# Altium PCB PCB1.PcbDoc
Units mm, origin at the board's own origin, x right, y up, seen from the top; angles counter-clockwise.
Board outline 152.4 x 101.6 mm, 2 copper layers (Top Layer, Bottom Layer); 73 components, 49 nets, 271 pads, 36 vias.
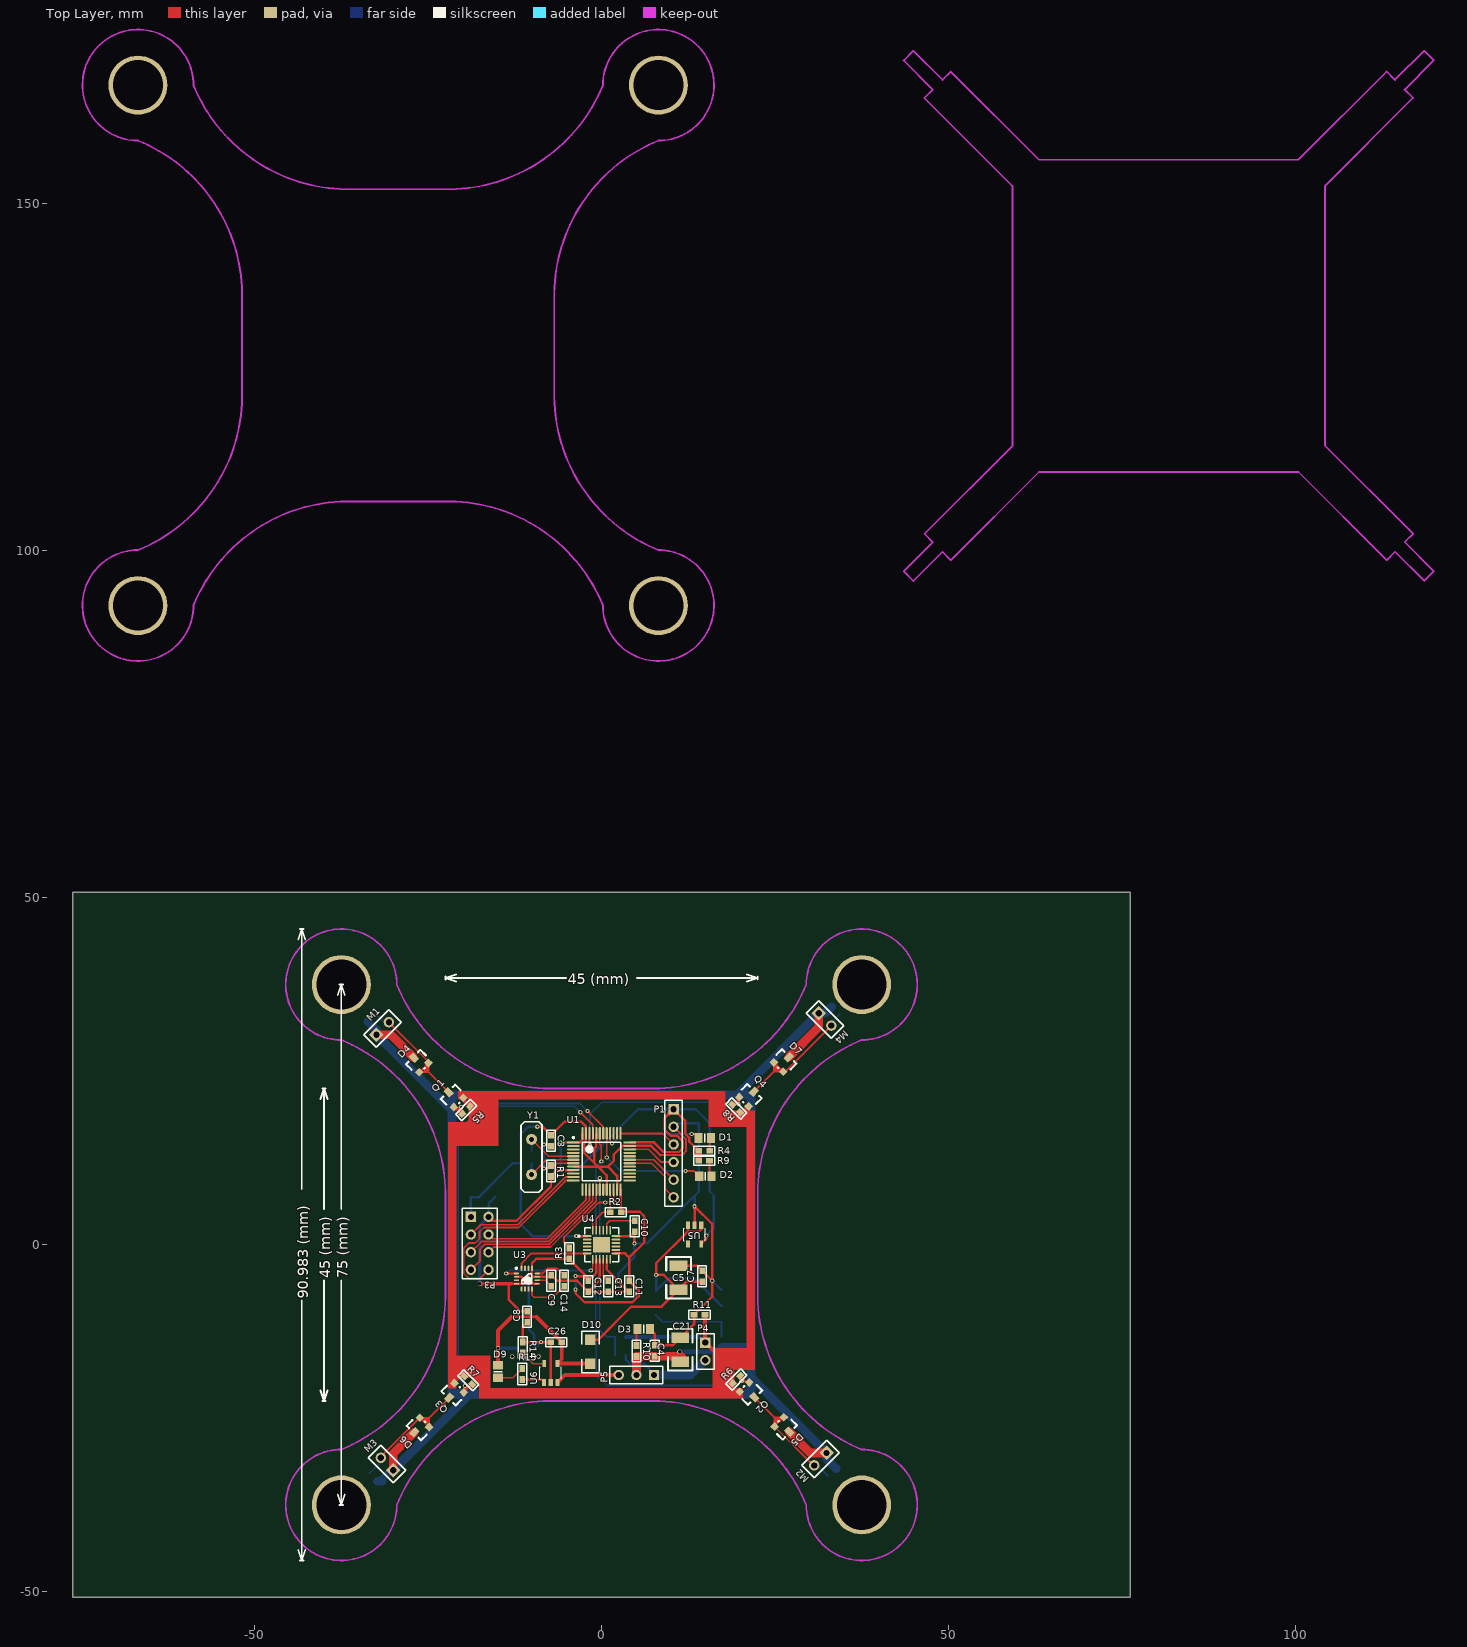
[diagram p0: Top Layer view]
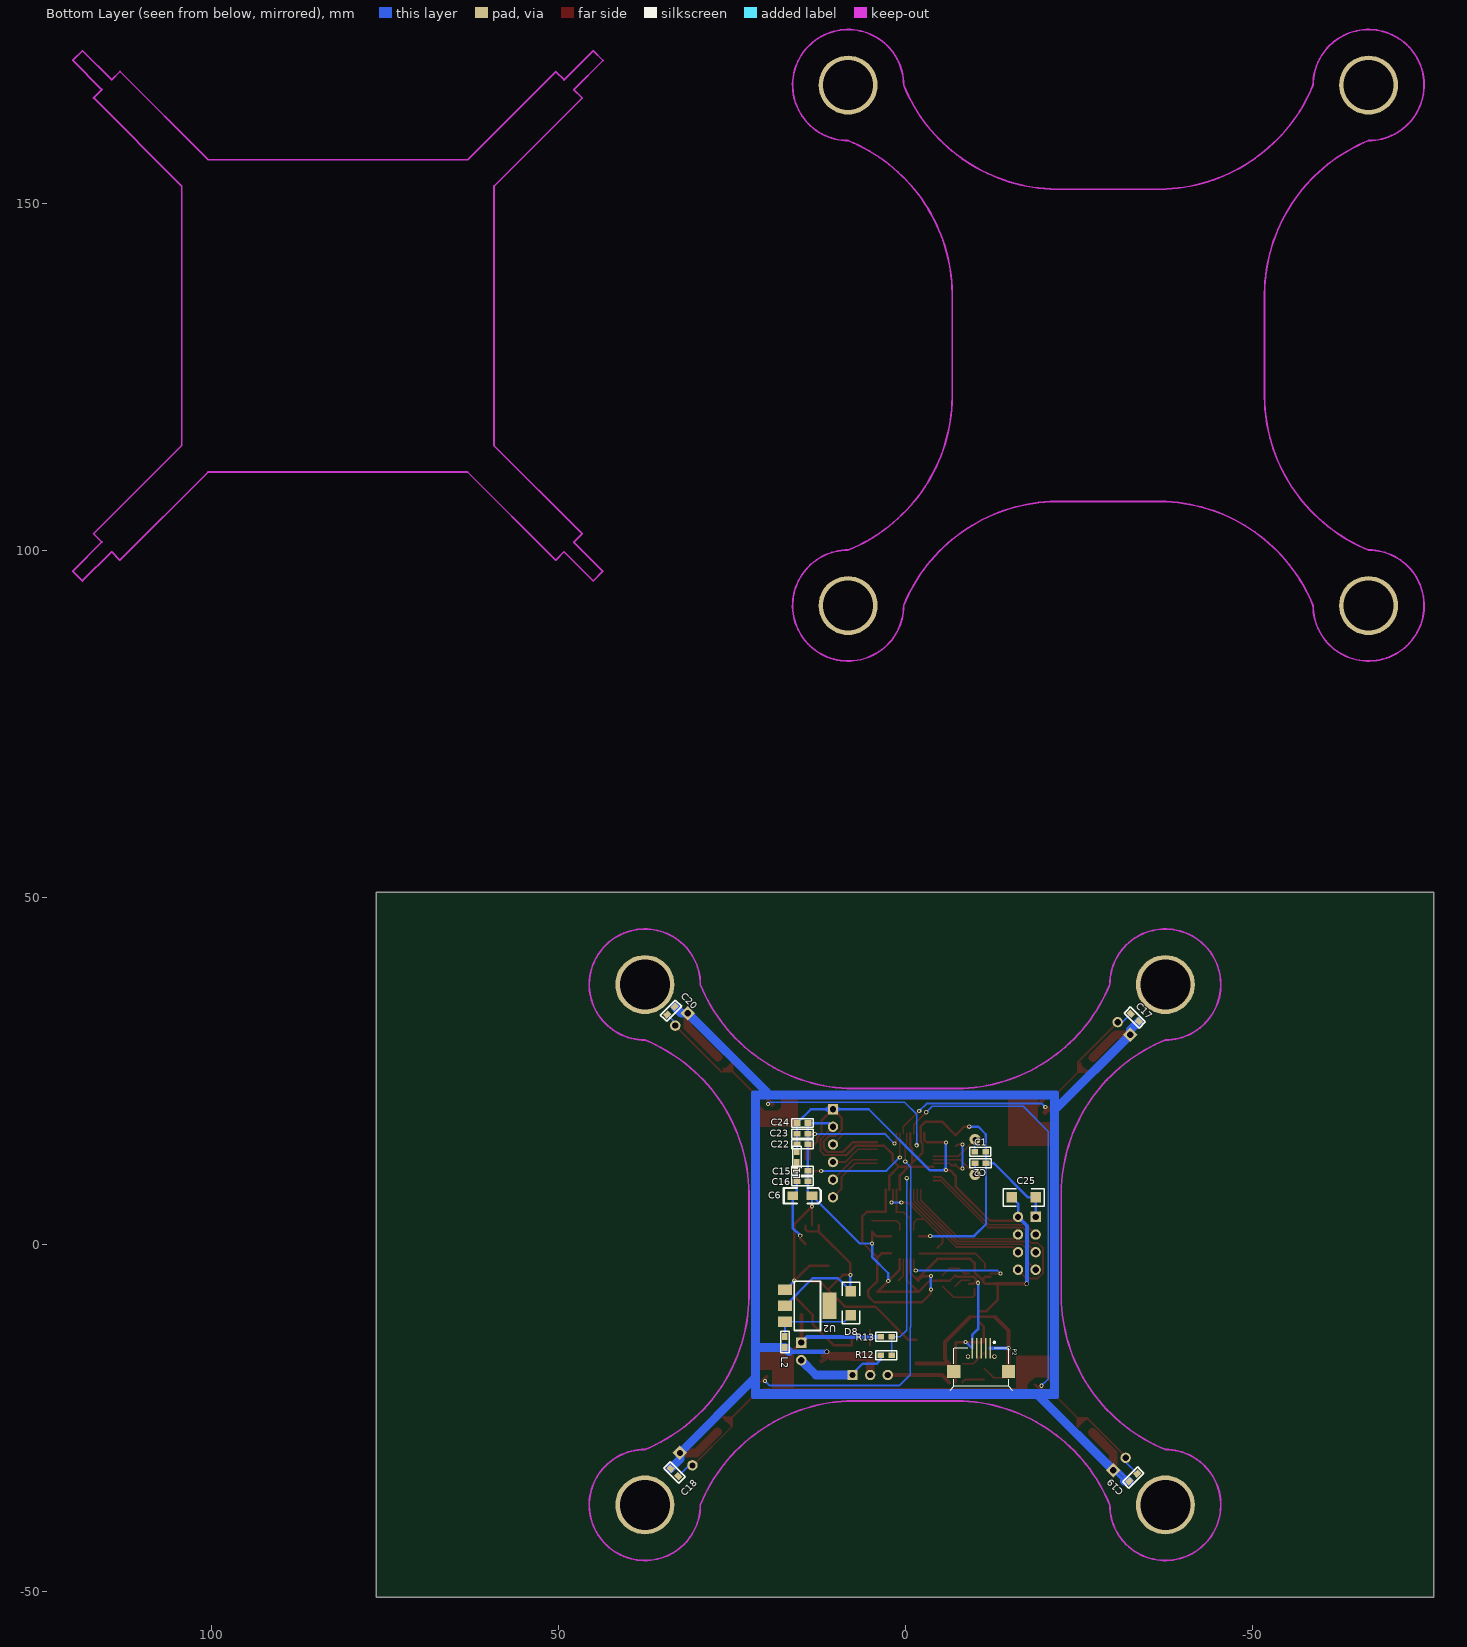
[diagram p1: Bottom Layer view, seen from below]
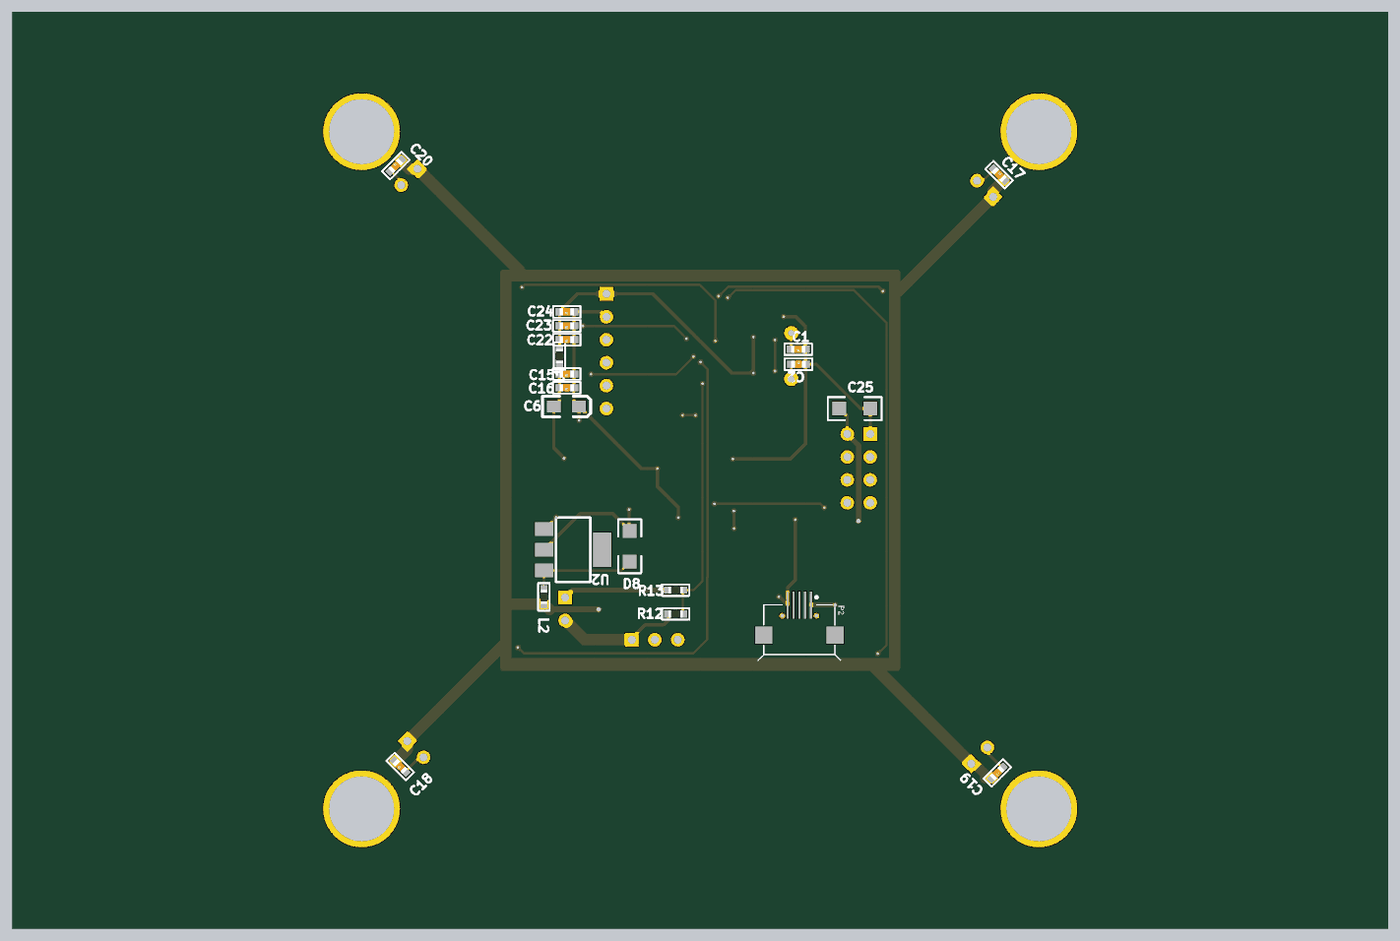
[diagram p2: 3D render of the assembled board from below, using the file's embedded part models]

## Layer stack, top to bottom
Top Solder: solder mask 0.0102, Solder Resist, Dk 3.5
Top Layer: signal copper 0.0356
Dielectric 1: dielectric 0.32, FR-4, Dk 4.8
Bottom Layer: signal copper 0.0356
Bottom Solder: solder mask 0.0102, Solder Resist, Dk 3.5

## Board outline
-76.2,-50.8 76.2,-50.8 76.2,50.8 -76.2,50.8

## Design rules (kind name [scope] priority, off if disabled: settings)
Clearance [All] p1: gap=0.139
PolygonConnect [All] p1: connectstyle=Relief reliefconductorwidth=0.254 reliefentries=4 polygonreliefangle="90 Angle" airgapwidth=0.254
RoutingVias [All] p1: holewidth=0.711 width=1.27 viastyle="Through Hole" minholewidth=0.711 minwidth=1.27 maxholewidth=0.711 maxwidth=1.27
SolderMaskExpansion [All] p1: expansion=0.102
Width Width_BGND [InNet('BGND')] p1: maxlimit=0.854 minlimit=0.254 preferedwidth=0.354
Width Width_GND [InNet('GND')] p2: maxlimit=0.554 minlimit=0.254 preferedwidth=0.354
Width Width_3V3 [InNet('VCC')] p3: maxlimit=1.27 minlimit=0.254 preferedwidth=0.508
Width Width_BAT [InNet('VCC_BAT')] p4: maxlimit=2.032 minlimit=0.254 preferedwidth=1.016
Width Width_3.7 [InNet('VCC_3.7VOUT')] p5: maxlimit=2.032 minlimit=0.254 preferedwidth=1.016
Width Width_1 [All] p6: maxlimit=0.554 minlimit=0.254 preferedwidth=0.254
29 further rules are at their usual default settings.

## Components (designator, comment, footprint, x,y, rotation, side; value= is the part's Value field where it differs from the comment)
C1 "Cap Semi" 0603-N-CAP -12.395,12.751 r0 bottom
C2 "Cap Semi" 0603-N-CAP -9.322,12.395 r180 bottom
C3 "Cap Semi" 0603-N-CAP -6.629,16.535 r270 top
C4 "Cap" 0603-N-CAP 8.331,-13.741 r270 top
C5 "Cap Pol3" 1210 11.1,-6.477 r90 top
C6 "Cap Pol3" 3216 16.205,7.061 r180 bottom
C7 "Cap" 0603-N-CAP 15.138,-2.972 r270 top
C8 "Cap Semi" 0603-N-CAP -11.379,-11.938 r90 top
C9 "Cap Semi" 0603-N-CAP -6.579,-3.632 r270 top
C10 "Cap Semi" 0603-N-CAP 5.436,4.216 r270 top
C11 "Cap Semi" 0603-N-CAP 3.327,-7.544 r90 top
C12 "Cap Semi" 0603-N-CAP -1.27,-4.445 r270 top
C13 "Cap Semi" 0603-N-CAP 0.33,-7.544 r90 top
C14 "Cap Semi" 0603-N-CAP -4.75,-3.632 r270 top
C15 "Cap" 0603-N-CAP 13.233,10.008 r0 bottom
C16 "Cap" 0603-N-CAP 13.233,8.484 r0 bottom
C17 "Cap" 0603-N-CAP -32.461,34.29 r225 bottom
C18 "Cap" 0603-N-CAP 32.588,-34.366 r45 bottom
C19 "Cap" 0603-N-CAP -34.442,-32.893 r315 bottom
C20 "Cap" 0603-N-CAP 35.281,33.096 r135 bottom
C21 "Cap Pol3" 1210 11.354,-16.84 r90 top
C22 "Cap" 0603-N-CAP 13.232,13.818 r0 bottom
C23 "Cap" 0603-N-CAP 13.233,15.342 r0 bottom
C24 "Cap" 0603-N-CAP 13.232,16.891 r0 bottom
C25 "Cap Semi" 1206 -18.821,6.833 r0 bottom
C26 "Cap" 0603-N-CAP -8.077,-13.386 r0 top
D1 "LED2" 6-0805_N 14.884,15.392 r180 top
D2 "LED2" 6-0805_N 14.961,9.881 r180 top
D3 "LED2" 6-0805_N 6.096,-12.141 r0 top
D4 "BAT54C" SOT-23 -27,27 r45 top
D5 "BAT54C" SOT-23 27,-27 r225 top
D6 "BAT54C" SOT-23 -27,-27 r135 top
D7 "BAT54C" SOT-23 27,27 r315 top
D8 "1N5819" 1206 7.798,-10.135 r90 bottom
D9 "LED2" 6-0805_N -14.923,-18.272 r270 top
D10 "1N5819" 1206 -1.6,-17.145 r90 top
L1 "Inductor" 0603-N-res 16.231,11.1 r90 bottom
L2 "Inductor" 0603-N-res 17.958,-15.57 r90 bottom
M1 "MOTO" HDR1X2 -32.436,30.277 r45 top
M2 "MOTO" HDR1X2 32.436,-29.997 r225 top
M3 "MOTO" HDR1X2 -30,-32.5 r135 top
M4 "MOTO" HDR1X2 31.318,33.376 r315 top
P1 "Pointer" HDR1X6 10.389,19.533 r270 top
P2 "USB" "Micro Usb" -10.973,-20.422 r270 bottom
P3 "NRF24L01" "head 4X2" -16.281,4.013 r270 top
P4 "BATTERY" HDR1X2 14.961,-14.097 r270 top
P5 "Switch" HDR1X3 7.569,-18.771 r180 top
Q1 "SI2302" SOT-23 -22,22 r45 top
Q2 "SI2302" SOT-23 22,-22 r225 top
Q3 "SI2302" SOT-23 -22,-22 r135 top
Q4 "SI2302" SOT-23 22,22 r315 top
R1 "Res2" 0603-N-res -6.629,12.167 r270 top
R2 "Res2" 0603-N-res 0.483,5.334 r0 top
R3 "Res2" 0603-N-res -4.013,0.305 r270 top
R4 "Res2" 0603-N-res 16.358,12.903 r180 top
R5 "Res2" 0603-N-res -17.958,20.041 r225 top
R6 "Res2" 0603-N-res 17.882,-20.066 r45 top
R7 "Res2" 0603-N-res -19.837,-17.983 r315 top
R8 "Res2" 0603-N-res 20.041,18.085 r135 top
R9 "Res2" 0603-N-res 16.332,11.455 r180 top
R10 "Res2" 0603-N-res 5.69,-13.767 r270 top
R11 "Res1" 0603-N-res 15.672,-10.744 r180 top
R12 "Res2" 0603-N-res 1.168,-16.561 r0 bottom
R13 "Res2" 0603-N-res 4.267,-12.624 r180 bottom
R14 "Res2" 0603-N-res -12.014,-16.358 r90 top
R15 "Res2" 0603-N-res -12.065,-20.168 r90 top
U1 "STM32F103C8T6" LQFP48_N 0,12 r0 top
U2 "BL8530-501SM" SOT223 17.297,-6.502 r270 bottom
U3 "HMC5883" HMC5883L -10.77,-5.258 r0 top
U4 "MPU6050" "MPU 6050" 0,0 r0 top
U5 "MIC5205" MIC5205 14.986,3.302 r270 top
U6 "LTC4054" MIC5205 -8.89,-20.345 r90 top
Y1 "8MHZ" XTAL1 -10.084,10.109 r90 top

## Footprints (in the part's own frame and the unit in brackets; to place one, negate y for a bottom-side part, rotate by r counter-clockwise, add the part's x,y. Pads: shape width x height; smd on the part's side, far side on the other; paste and mask are expansions set on the pad)
6-0805_N [mm] "Chip Resistor, Body 2.0x1.2mm, IPC Medium Density"
  rect 1.2x1.4 smd: 1(-0.9,0) 2(0.9,0)
  silkscreen extent 0,-0.6 0,0.6, body extent -1.07,-0.7 1.07,0.7, height 0.7
0603-N-CAP [mm]
  rect 0.965x0.8 smd: 1(0.76,-0.65) 2(2.34,-0.65)
  silkscreen extent 0.03,-1.28 3.07,-0.01, body extent 0.75,-1.05 2.35,-0.25, height 0.3
0603-N-res [mm]
  rect 0.965x0.8 smd: 1(0.76,-0.65) 2(2.34,-0.65)
  silkscreen extent 0.03,-1.28 3.07,-0.01, body extent 0.75,-1.05 2.35,-0.25, height 0.4
1206 [mil]
  rect 60x60 smd: 1(0,0) 2(135,0)
  silkscreen extent -50,-50 185,50
1210 [mil]
  rect 60x100 smd: 1(0,0) 2(135,0)
  silkscreen extent -50,-70 185,70
3216 [mil]
  rect 60x50 smd: 1(0,0) 2(110,0)
  silkscreen extent -50,-45 160,45
HDR1X2 [mm] "Connector; Header; 2 Position"
  rect 1.5x1.5 hole 0.9: 1(0,0)
  round 1.5 hole 0.9: 2(2.54,0)
  silkscreen extent -1.27,-1.27 3.81,1.27
HDR1X3 [mm] "Connector; Header; 3 Position"
  rect 1.5x1.5 hole 0.9: 1(0,0)
  round 1.5 hole 0.9: 2(2.54,0) 3(5.08,0)
  silkscreen extent -1.27,-1.27 6.35,1.27
HDR1X6 [mm] "Connector; Header; 6 Position"
  rect 1.5x1.5 hole 0.9: 1(0,0)
  round 1.5 hole 0.9: 2(2.54,0) 3(5.08,0) 4(7.62,0) 5(10.16,0) 6(12.7,0)
  silkscreen extent -1.27,-1.27 13.97,1.27
"head 4X2" [mm]
  rect 1.5x1.5 hole 0.9: 1(0,-2.54)
  round 1.5 hole 0.9: 2(0,0) 3(2.54,-2.54) 4(2.54,0) 5(5.08,-2.54) 6(5.08,0) 7(7.62,-2.54) 8(7.62,0)
  silkscreen extent -1.27,-3.81 8.89,1.27
HMC5883L [mm]
  oval 0.75x0.254 smd: 1(-1.5,1.131) 2(-1.5,0.631) 3(-1.5,0.131) 4(-1.5,-0.369) 9(1.5,-0.369) 10(1.5,0.131) 11(1.5,0.631) 12(1.5,1.131)
  oval 0.254x0.75 smd: 5(-0.75,-1.119) 6(-0.25,-1.119) 7(0.25,-1.119) 8(0.75,-1.119) 13(0.75,1.881) 14(0.25,1.881) 15(-0.25,1.881) 16(-0.75,1.881)
  silkscreen extent -1.62,-0.34 0.73,2.01, body extent -1.5,-1.12 1.5,1.88, height 0.9
LQFP48_N [mm] "Thin QFP, 48-Leads, Body 7x7mm, Pitch 0.5mm, IPC Medium Density"
  oval 1.8x0.3 smd: 1(-4.05,2.75) 2(-4.05,2.25) 3(-4.05,1.75) 4(-4.05,1.25) 5(-4.05,0.75) 6(-4.05,0.25) 7(-4.05,-0.25) 8(-4.05,-0.75) 9(-4.05,-1.25) 10(-4.05,-1.75) 11(-4.05,-2.25) 12(-4.05,-2.75) 25(4.05,-2.75) 26(4.05,-2.25) 27(4.05,-1.75) 28(4.05,-1.25) 29(4.05,-0.75) 30(4.05,-0.25) 31(4.05,0.25) 32(4.05,0.75) 33(4.05,1.25) 34(4.05,1.75) 35(4.05,2.25) 36(4.05,2.75)
  oval 0.3x1.8 smd: 13(-2.75,-4.05) 14(-2.25,-4.05) 15(-1.75,-4.05) 16(-1.25,-4.05) 17(-0.75,-4.05) 18(-0.25,-4.05) 19(0.25,-4.05) 20(0.75,-4.05) 21(1.25,-4.05) 22(1.75,-4.05) 23(2.25,-4.05) 24(2.75,-4.05) 37(2.75,4.05) 38(2.25,4.05) 39(1.75,4.05) 40(1.25,4.05) 41(0.75,4.05) 42(0.25,4.05) 43(-0.25,4.05) 44(-0.75,4.05) 45(-1.25,4.05) 46(-1.75,4.05) 47(-2.25,4.05) 48(-2.75,4.05)
  silkscreen extent -4.17,-2.75 2.75,3.57, body extent -3.5,-3.5 3.5,3.5, height 1.6
MIC5205 [mm]
  rect 1.05x0.6 smd: 1(0.51,-0.625) 2(0.51,-1.575) 3(0.51,-2.525)
  rect 1x0.55 smd: 4(3.21,-2.525) 5(3.21,-0.625)
  silkscreen extent 0.93,-3.11 2.73,-0.01, body extent 0.51,-3.04 3.31,-0.14, height 1.09
"Micro Usb" [mm]
  rect 3x0.25 smd: 1(-5.508,1.3) 2(-5.508,0.65) 3(-5.508,0) 4(-5.508,-0.65) 5(-5.508,-1.3)
  round 0.635 hole 0.457 unplated: MH1(-4.3,1.9) MH2(-4.3,-1.9)
  rect 1.9x1.9 smd: ""(-2.15,-3.95) ""(-2.15,3.95)
  silkscreen extent -6.47,-4.57 0.63,4.57
"MPU 6050" [mm]
  oval 1.25x0.25 smd: 1(-2.075,1.25) 2(-2.075,0.75) 3(-2.075,0.25) 4(-2.075,-0.25) 5(-2.075,-0.75) 6(-2.075,-1.25) 13(2.075,-1.25) 14(2.075,-0.75) 15(2.075,-0.25) 16(2.075,0.25) 17(2.075,0.75) 18(2.075,1.25)
  oval 0.25x1.25 smd: 7(-1.25,-2.075) 8(-0.75,-2.075) 9(-0.25,-2.075) 10(0.25,-2.075) 11(0.75,-2.075) 12(1.25,-2.075) 19(1.25,2.075) 20(0.75,2.075) 21(0.25,2.075) 22(-0.25,2.075) 23(-0.75,2.075) 24(-1.25,2.075)
  rect 2.5x2.3 smd: 25(0,0)
  silkscreen extent -3.37,-2.45 2.45,2.45, body extent -2.41,-2.41 2.41,2.41, height 0.9
SOT223 [mil]
  rect 59x79 smd: 1(0,0) 2(90.55,0) 3(181.1,0)
  rect 150x79 smd: 4(89.88,253.54)
  silkscreen extent -49,52 231,202
SOT-23 [mil]
  rect 36x36 smd: 1(-40,-80) 2(35,-80)
  rect 36x50 smd: 3(-2,0)
  silkscreen extent -60,-85 55,5
XTAL1 [mil]
  round 62 hole 28: 1(0,0) 2(200,0)
  silkscreen extent -100,-60 300,60

## Part data
C1 C2 C3 C8 C9 C10 C11 C12 C13 C14 C25: "Capacitor (Semiconductor SIM Model)"
C4 C7 C15 C16 C17 C18 C19 C20 C22 C23 C24 C26: "Capacitor"
C5 C6 C21: "Polarized Capacitor (Surface Mount)"
D1 D2 D3 D9: "Typical RED, GREEN, YELLOW, AMBER GaAs LED"
D8 D10: library part TUNNEL, "Tunnel FDiode"
P1: library part "Header 6", "Header, 6-Pin"
P2: library part "Header 5", "Header, 5-Pin"
P3: library part "Header 4X2H", "Header, 4-Pin, Dual row, Right Angle"
P4: library part "Header 2", "Header, 2-Pin"
P5: library part "Header 3", "Header, 3-Pin"
Q1 Q2 Q3 Q4: library part MOSFET-N, "N-Channel MOSFET"
R1 R2 R3 R4 R5 R6 R7 R8 R9 R10 R11 R12 R13 R14 R15: "Resistor"
U1: "STM32 ARM-based 32-bit MCU with 64 Kbytes Flash, 48-pin LQFP, Industrial Temperature"
U2: library part ME620633
U5: "5V降压到3.3V"
Y1: library part XTAL, "Crystal Oscillator"

## Free pads (board coordinates)
  round 8.5 hole 7.2: 1(-66.797,167.112) 1(-37.5,37.5) 2(-66.797,92.112) 2(-37.5,-37.5) 3(8.203,92.112) 3(37.5,-37.5) 4(8.203,167.112) 4(37.5,37.5)

## Via types
v1: diameter 0.61, hole 0.305, Top Layer to Bottom Layer, 32 vias
v2: diameter 0.71, hole 0.505, Top Layer to Bottom Layer, 1 vias
v3: diameter 0.61, hole 0.404, Top Layer to Bottom Layer, 1 vias
v4: diameter 0.61, hole 0.505, Top Layer to Bottom Layer, 1 vias
v5: diameter 0.61, hole 0.354, Top Layer to Bottom Layer, 1 vias

## Nets (pads, with @x,y where several pads share a name; then routed paths per layer and width w, separated by ;. In a path a pad name is that pad's centre, name@x,y a point inside that pad or via, vN(x,y) a via of type N, cw(c..) or ccw(c..) an arc to the next point about the centre after c; other vN are vias at no path point)
5V: C5.1 C7.2 D8.2 D10.2 U2.2 U5.1 U5.3 | length 49.6
  Top Layer w0.254: 12.461,1.92 14.087,1.92 ; 14.361,2.194 U5.1
  Top Layer w0.354: D10.2 -0.508,-13.716 4.293,-8.915 8.661,-8.915 C5.1 ; U5.3 12.461,1.92 7.874,-2.667 v1(7.874,-4.343) 8.966,-4.343 C5.1 ; 14.087,1.92 14.361,2.194 ; C7.2 12.265,-5.312 C5.1
  Bottom Layer w0.254: D8.2 D8.2@7.874,-6.629
  Bottom Layer w0.354: v1(7.874,-4.343) 7.874,-6.629 9.703,-4.801 13.296,-4.801 U2.2
AD_IN: R12.1 R13.2 U1.18 | length 28.8
  Top Layer w0.254: U1.18 v1(-0.25,9.597)
  Bottom Layer w0.254: v1(-0.25,9.597) -0.25,-12.298 0.726,-13.274 R13.2 R13.2 R12.1
AUX_CL: U3.1 U4.7 | length 15.6
  Top Layer w0.254: v1(-13.741,-4.14) -12.283,-4.14 U3.1 ; v1(-1.549,-3.708) -1.25,-3.409 U4.7
  Bottom Layer w0.254: v1(-13.741,-4.14) -13.31,-3.708 v1(-1.549,-3.708)
AUX_DA: U3.16 U4.6 | length 10.7
  Top Layer w0.254: U3.16 -11.52,-2.655 -10.115,-1.25 U4.6
BAT_IN: P5.3 U6.3 | length 9.3
  Top Layer w0.554: U6.3 -5.3,-18.771 P5.3
BGND: P4.1 Q1.2 Q2.2 Q3.2 Q4.2 R5.1 R6.1 R7.1 R8.1 R11.1 R13.1 | length 200.6
  Top Layer w0.254: -21.666,-19.456 ccw(c-21.514,-18.034) -20.091,-18.186 ; -21.641,-19.202 ccw(c-21.285,-18.009) -20.091,-18.364 ; Q3.2 -20.237,-18.98 R7.1 R7.1@-19.601,-18.821 ; Q1.2@-19.935,20.943 Q1.2 ; -18.771,-18.694 ccw(c-16.942,-17.882) -16.129,-19.71 ; -18.567,-18.567 ccw(c-16.929,-17.843) -16.205,-19.482 ; -18.034,-18.821 ccw(c-16.497,-18.961) -16.637,-20.498 ; P4.1@14.912,-14.048 P4.1 ; R8.1 R8.1@20.339,19.082
  Top Layer w0.354: -21.285,15.469 -21.285,-17.455 R7.1 ; R7.1@-19.601,-18.821 -18.034,-18.821 -15.646,-21.209 17.658,-21.209 ; -18.288,21.692 15.672,21.692 ; 21.285,-15.367 21.285,17.759
  Top Layer w0.554: -21.285,15.469 -18.364,18.39 -18.364,19.372 R5.1 Q1.2@-19.935,20.943 ; P4.1@14.912,-14.048 R11.1 ; P4.1 18.313,-17.45 18.313,-19.423 R6.1 17.658,-21.209 ; 15.672,21.692 18.282,19.082 R8.1 21.285,17.759 ; 18.377,-18.275 21.285,-15.367 ; R8.1@20.339,19.082 Q4.2
  Bottom Layer w0.554: R13.1 14.137,-13.274 P4.1
CE: P3.3 U1.11 | length 18.2
  Top Layer w0.254: P3.3 -17.399,2.896 -12.087,2.896 -5.233,9.75 U1.11
CHG5V: C26.2 D9.1 D10.1 P2.1 U6.4 | length 27.3
  Top Layer w0.254: D10.1@-1.61,-17.135 D10.1
  Top Layer w0.324: -12.954,-10.389 -9.384,-10.389
  Top Layer w0.554: D9.1 -14.923,-12.357 -12.954,-10.389 ; -9.384,-10.389 C26.2 -5.737,-16.508 U6.4 D10.1@-1.61,-17.135
  Bottom Layer w0.554: v3@-14.923,-14.914 P2.1
  other v3: -14.923,-14.91
CSN: P3.4 U1.14 | length 18.1
  Top Layer w0.254: P3.4 -15.672,0.864 -7.823,0.864 -2.25,6.437 U1.14
GND: C1.1 C2.2 C3.1 C4.1 C5.2 C6.2 C7.1 C8.1 C9.1 C10.2 C11.1 C12.2 C13.1 C15.1 C16.1 C21.2 C22.1 C23.1 C24.1 C25.1 C26.1 D3.2 P1.2 P2.5 P3.1 R11.2 R14.2 U1.8 U1.20 U1.23 U1.35 U1.44 U1.47 U2.1 U3.9 U3.11 U4.1 U4.9 U4.11 U4.18 U5.2 U6.2 | length 218.7
  Top Layer w0.254: C9.1@-7.463,-4.627 C9.1 ; U6.2@-7.335,-19.815 U6.2 ; C10.2@4.75,1.841 C10.2 ; 8.458,12.929 11.608,12.929
  Top Layer w0.284: P1.2 12.167,15.215 12.167,13.487 11.608,12.929
  Top Layer w0.304: -6.439,-5.182 -3.521,-5.182
  Top Layer w0.354: C8.1 -11.364,-11.813 R14.2 v1(-8.712,-14.018) -7.335,-14.018 U6.2@-7.335,-19.815 ; v1(-10.516,-5.486) v1@-10.312,-5.486 ; U3.9 -9.867,-5.627 -10.16,-5.334 -10.16,-4.877 -9.91,-4.627 U3.11 C9.1@-7.463,-4.627 ; v1(-9.246,17.018) -8.522,17.018 C3.1 -5.3,17.755 -2.946,17.755 -2.25,17.058 U1.47 -2.25,14.87 -2.515,14.605 -2.515,13.257 -1.067,11.809 ; C9.1 -6.439,-5.182 ; U1.8 -0.508,11.25 ; v1(-3.627,1.25) U4.1 ; -3.521,-5.182 C12.2@-1.919,-6.784 ; U1.44 -0.75,14.16 -1.067,13.843 -1.067,11.809 ; U4.9 -0.25,-5.115 C12.2@-1.919,-6.784 ; U4.11 0.75,-3.556 C11.1 C13.1 C12.2@-1.919,-6.784 ; U1.20 0.75,9.992 -0.508,11.25 ; U4.18 4.159,1.25 4.75,1.841 v1(4.75,0.178) ; U1.23 2.25,9.917 0.917,11.25 ; D3.2 7.681,-12.826 C4.1 10.264,-14.501 C21.2 13.332,-11.433 R11.2 15.951,-7.475 v1(15.951,-5.195) ; 8.458,12.929 7.137,14.25 U1.35 2.998,14.25 1.755,13.007 1.755,12.088 0.917,11.25 ; C5.2 13.805,-3.048 C7.1 v1(15.951,-5.195) ; U5.2 v1(13.411,5.537) 15.951,2.997 v1(15.951,-5.195) ; -1.067,11.809 -0.508,11.25 ; -0.508,11.25 0.917,11.25
  Bottom Layer w0.254: v1@-8.777,-14.018 v1(-8.712,-14.018) ; C6.2 C6.2@13.993,7.643 ; C22.1 C22.1@13.993,14.466 ; U2.1@17.259,-6.502 U2.1
  Bottom Layer w0.354: P3.1 C25.1 -17.729,6.833 -12.817,11.745 C2.2 ; C1.1@-11.662,13.374 C2.2 ; C1.1 -11.635,15.924 -10.541,17.018 v1(-9.246,17.018) ; v1(-10.516,-5.486) -10.516,-12.167 -9.673,-13.009 P2.5 v1@-8.777,-14.018 ; v1(-3.627,1.25) -9.962,1.25 -11.662,2.95 C2.2 ; v1(2.426,-5.232) 2.426,-4.102 4.75,-1.778 v1(4.75,0.178) 6.528,0.178 C6.2 v1(13.411,5.537) ; P1.2 10.937,17.541 C24.1 C22.1 ; C6.2@13.993,7.643 C16.1 C15.1 C22.1@13.993,14.466 ; v1(15.951,-5.195) U2.1@17.259,-6.502
"IIC2 SCL": R2.1 U1.21 U4.23 | length 7.3
  Top Layer w0.254: U4.23 -0.75,3.771 0.163,4.684 R2.1 1.25,4.691 U1.21
"IIC2 SDA": R3.1 U1.22 U4.24 | length 15.8
  Top Layer w0.254: R3.1 -5.41,0.292 -5.41,1.053 -2.806,3.658 ; U4.24 -1.25,3.18 -1.727,3.658 -2.806,3.658 ; v1(0.533,6.096) -0.368,6.096 -2.806,3.658 ; 1.75,6.327 U1.22
  Bottom Layer w0.254: v1(0.533,6.096) v1(1.956,6.096)
IRQ: P3.8 U1.12 | length 28.5
  Top Layer w0.254: P3.8 -17.551,-4.877 -19.075,-4.877 -19.888,-4.064 -19.888,-0.508 -19.126,0.254 -18.212,0.254 -17.577,0.889 -17.577,1.854 -16.942,2.489 -11.938,2.489 -5.177,9.25 U1.12
"LED GRE": D2.2 U1.41 | length 17.9
  Top Layer w0.254: v1(0.75,12.585) U1.41 ; v1(12.09,10.643) 13.299,10.643 D2.2
  Bottom Layer w0.254: v1(0.75,12.585) 2.692,10.643 v1(12.09,10.643)
"LED RED": D1.2 U1.40 | length 14.9
  Top Layer w0.254: U1.40 1.25,14.854 v1(1.524,14.58) ; v1(13.005,15.977) 13.4,15.977 D1.2
  Bottom Layer w0.254: v1(1.524,14.58) 2.921,15.977 v1(13.005,15.977)
MISO: P3.7 U1.16 | length 24.3
  Top Layer w0.254: P3.7 -17.501,-2.286 -17.501,-0.584 -16.854,0.063 -7.512,0.063 -1.25,6.325 U1.16
MOSI: P3.6 U1.17 | length 20.3
  Top Layer w0.254: P3.6 -15.545,-0.33 -7.35,-0.33 -0.75,6.269 U1.17
MOTOR1: Q1.1 R5.2 U1.42 | length 33.8
  Top Layer w0.254: Q1.1@-21.133,20.015 ccw(c-20.587,20.383) v1(-20.218,19.837) ; v1@-20.345,19.66 cw(c-20.721,20.22) Q1.1 -20.752,19.315 ; v1@-20.066,19.685 ccw(c-19.732,19.447) R5.2@-19.837,19.05 ; v1@-2.184,19.152 cw(c-2.191,18.458) -1.676,18.923 cw(c-1.212,19.438) v1@-1.905,19.431 ; v1(-2.032,19.279) 0.25,16.997 U1.42 ; -20.752,19.315 R5.2@-20.282,18.846 ; -20.752,19.315 -20.741,19.315 v1(-20.218,19.837) ; R5.2@-20.282,18.846 cw(c-19.754,19.309) v1(-20.218,19.837) ; R5.2@-20.282,18.846 R5.2 cw(c-19.649,19.415) v1(-20.218,19.837)
  Bottom Layer w0.254: v1@-20.345,20.015 ccw(c-20.271,20.558) -19.863,20.193 ccw(c-19.568,19.781) v1@-20.066,19.685 ; v1(-20.218,19.837) -19.71,20.345 -3.099,20.345 v1(-2.032,19.279) ; v1@-2.159,19.126 ccw(c-3.864,18.664) -2.388,19.634 ccw(c-1.9,20.119) v1@-1.905,19.431
MOTOR2: Q2.1 R6.2 U1.43 | length 64.2
  Top Layer w0.254: U1.43 -0.25,14.499 -0.025,14.275 v1(-0.025,11.989) ; v1@-0.229,11.989 ccw(c-0.713,12.477) -0.025,12.471 ccw(c0.662,12.477) v1@0.178,11.989 ; R6.2@19.787,-19.075 cw(c19.71,-19.558) v1(20.193,-19.634) cw(c20.171,-21.252) Q2.1@20.97,-19.845 ; R6.2@19.887,-18.871 R6.2 Q2.1@20.97,-19.845 ; v1@20.193,-19.627 20.472,-19.348 ; Q2.1 Q2.1@20.97,-19.845
  Bottom Layer w0.254: v1@-0.178,12.141 cw(c-0.88,12.125) -0.423,11.591 cw(c0.11,11.134) v1@0.127,11.836 ; v1(-0.025,11.989) -0.821,11.193 -0.821,-11.852 -0.762,-11.91 -0.762,-18.72 0.787,-20.269 19.558,-20.269 v1(20.193,-19.634) ; v1@20.041,-19.482 cw(c19.501,-19.556) 19.875,-19.952 cw(c20.248,-20.259) v1@20.345,-19.787
MOTOR3: Q3.1 R7.2 U1.45 | length 68.3
  Top Layer w0.254: Q3.1@-19.888,-20.879 ccw(c-20.053,-20.485) v1(-19.66,-20.32) ; Q3.1@-19.827,-21.282 R7.2 ; Q3.1@-19.812,-21.057 ccw(c-19.977,-20.612) v1@-19.533,-20.447 ; -19.297,-20.683 v1(-19.66,-20.32) ; R7.2@-18.847,-20.168 cw(c-19.329,-19.837) v1(-19.66,-20.32) ; v1@-3.2,18.948 cw(c-3.34,17.886) -2.667,18.72 cw(c-2.288,19.198) v1@-2.896,19.253 ; v1(-3.048,19.101) -1.25,17.303 U1.45
  Bottom Layer w0.254: v1@-19.787,-20.472 ccw(c-21.769,-20.929) -19.964,-19.99 ccw(c-19.225,-18.764) v1@-19.507,-20.168 ; v1(-19.66,-20.32) -20.638,-19.341 -20.638,16.319 -17.005,19.952 -3.9,19.952 v1(-3.048,19.101) ; v1@-3.175,18.948 ccw(c-5.047,18.347) -3.474,19.527 ccw(c-2.866,19.994) v1@-2.896,19.228
MOTOR4: Q4.1 R8.2 U1.46 | length 37.2
  Top Layer w0.254: v1@-1.905,14.275 ccw(c-3.013,14.891) -1.75,14.783 ccw(c-0.171,15.427) v1@-1.473,14.326 ; U1.46 -1.75,14.399 v1(-1.676,14.326) ; R8.2@19.101,19.939 cw(c19.583,19.787) v1(19.736,20.269) ; Q4.1@19.934,20.912 ccw(c20.218,20.472) v1(19.736,20.269) ; 19.355,20.708 ccw(c22.656,16.898) R8.2 cw(c19.326,19.789) v1(19.736,20.269) ; 19.355,20.708 19.845,21.198 ccw(c20.255,20.679) v1(19.736,20.269) ; 19.355,20.708 19.355,20.65 v1(19.736,20.269)
  Bottom Layer w0.254: v1@-1.905,14.326 ccw(c-2.629,14.973) -1.676,14.783 ccw(c-0.984,14.817) v1@-1.473,14.326 ; v1(-1.676,14.326) -1.676,18.796 0.076,20.549 19.456,20.549 ; v1@19.609,20.091 ccw(c19.304,20.244) 19.456,20.549 ; v1(19.736,20.269) 19.456,20.549 ; v1@19.863,20.422 cw(c19.723,20.688) 19.456,20.549
NetC1_2: C1.2 U1.5 Y1.2 | length 8.8
  Top Layer w0.254: Y1.2 -7.645,12.75 U1.5
  Bottom Layer w0.254: Y1.2 -10.055,15.161 C1.2
NetC2_1: C2.1 U1.6 Y1.1 | length 8.6
  Top Layer w0.254: Y1.1 -7.936,12.257 -4.057,12.257 U1.6
  Bottom Layer w0.254: Y1.1 -10.082,10.111 C2.1
NetC3_2: C3.2 R1.1 U1.7 | length 9.1
  Top Layer w0.254: v1(-8.28,10.998) -7.789,10.998 -7.381,11.407 R1.1 -6.754,11.407 -6.411,11.75 U1.7 ; v1(-8.28,14.427) -7.511,14.427 C3.2 ; R1.1@-7.279,11.686 R1.1@-7.254,11.661
  Bottom Layer w0.254: v1(-8.28,10.998) v1(-8.28,14.427)
NetC6_1: C6.1 C15.2 C16.2 L1.1 U5.5 | length 12.8
  Top Layer w0.354: U5.5 15.088,0.819 v5(15.088,1.321)
  Bottom Layer w0.254: C6.1@15.581,7.686 C6.1
  Bottom Layer w0.354: v5(15.088,1.321) 16.205,2.438 C6.1 ; C6.1@15.581,7.686 L1.1
NetC9_2: C9.2 U3.10 | length 2.4
  Top Layer w0.254: U3.10 -8.074,-5.127 C9.2
NetC10_1: C10.1 U4.20 | length 5.2
  Top Layer w0.254: U4.20 0.75,3.011 1.196,3.456 C10.1
NetC13_2: C13.2 U4.10 | length 3.4
  Top Layer w0.254: U4.10 0.25,-4.474 C13.2
NetC14_1: C14.1 U3.12 | length 4.6
  Top Layer w0.254: U3.12 -8.47,-4.127 -7.722,-3.378 -6.414,-3.378 C14.1
NetC14_2: C14.2 U3.8 | length 6.3
  Top Layer w0.254: U3.8 -10.02,-7.252 -9.703,-7.569 -6.997,-7.569 C14.2
NetC17_1: C17.1 D4.1 D4.2 M1.2 Q1.3 | length 24.8
  Top Layer w0.254: M1.2 -24.935,26.368 D4.2 ; D4.1@-26.391,25.07 cw(c-24.719,20.811) -25.044,25.375 ; -25.375,24.845 cw(c-2.281,24.281) D4.2@-25.298,26.238 ; -25.171,24.845 cw(c-21.707,24.93) D4.2 ; -25.044,25.095 ccw(c-25.152,22.445) D4.1 ; Q1.3 -24.917,24.845 ; D4.1 D4.2 ; D4.1 -24.917,24.845 ; D4.2 cw(c-55.874,25.106) -24.917,24.845
  Bottom Layer w0.254: C17.1 -31.319,32.073 M1.2
NetC18_1: C18.1 D5.1 D5.2 M2.2 Q2.3 | length 26.9
  Top Layer w0.254: Q2.3 24.917,-24.845 ; 24.892,-25.095 ccw(c25.4,-24.536) D5.1@25.959,-25.044 ; D5.2@24.917,-25.857 ccw(c23.928,-24.49) 25.578,-24.845 ; 24.917,-25.349 ccw(c25.362,-24.956) 25.756,-25.4 ; D5.2@24.968,-26.158 ccw(c23.311,-25.566) 24.917,-24.845 ; D5.1@26.06,-24.79 cw(c25.461,-24.246) 24.917,-24.845 ; M2.2 30.536,-31.793 D5.2 ; 24.917,-24.845 cw(c24.252,-25.527) D5.2 ; 24.917,-24.845 ccw(c52.348,-25.153) D5.2 ; 24.917,-24.845 D5.1 D5.2
  Bottom Layer w0.254: M2.2 31.09,-31.793 C18.1
NetC19_1: C19.1 D6.1 D6.2 M3.2 Q3.3 | length 25.3
  Top Layer w0.254: M3.2 -31.796,-30.539 D6.2 ccw(c-25.691,-11.956) -24.845,-24.917 ; D6.2 D6.1 -24.845,-24.917 ; D6.2@-26.086,-25.197 cw(c-25.489,-27.487) -24.892,-25.197 ; -25.806,-25.375 cw(c-25.455,-27.307) -24.892,-25.425 ; -25.578,-24.968 ccw(c-24.856,-24.957) D6.1@-24.845,-25.679 ; -25.248,-25.019 ccw(c-24.576,-25.287) -24.845,-25.959 cw(c-24.324,-25.438) -24.845,-24.917 ; Q3.3 -24.845,-24.917
  Bottom Layer w0.254: C19.1 -31.796,-31.321 M3.2
NetC20_1: C20.1 D7.1 D7.2 M4.2 Q4.3 | length 24.2
  Top Layer w0.254: Q4.3 24.845,24.917 ; 24.816,25.578 cw(c29.807,-37.148) 25.502,25.629 ; D7.1@24.816,25.832 ccw(c24.968,26.086) 25.222,25.933 ; 24.841,25.375 ccw(c25.159,43.218) D7.2@26.162,25.4 ; 24.845,25.146 ccw(c25.16,33.568) D7.2@26.137,25.197 ; M4.2 26.469,24.935 D7.2 ; 24.845,24.917 ccw(c25.106,55.874) D7.2 ; 24.845,24.917 D7.1 D7.2
  Bottom Layer w0.254: M4.2 33.114,32.005 C20.1
NetD1_1: D1.1 R4.1 | length 1.9
  Top Layer w0.254: R4.1 15.598,15.206 D1.1
NetD2_1: D2.1 R9.1 | length 2.3
  Top Layer w0.254: R9.1 15.572,10.169 D2.1
NetD3_1: D3.1 R10.1 | length 2.2
  Top Layer w0.254: R10.1 D3.1@5.04,-12.298
NetD8_1: D8.1 L2.2 U2.3 | length 12
  Bottom Layer w0.254: D8.1 8.766,-11.102 U2.3 17.308,-11.113 L2.2
NetD9_2: D9.2 R15.2 | length 4.1
  Top Layer w0.254: D9.2 -12.759,-19.172 R15.2
NetR14_1: R14.1 U6.5 | length 3.7
  Top Layer w0.254: R14.1 -9.826,-17.135 U6.5
NetR15_1: R15.1 U6.1 | length 3.3
  Top Layer w0.254: R15.1 -8.693,-19.408 U6.1
RXD: P1.5 U1.31 | length 7.5
  Top Layer w0.254: U1.31 7.511,12.25 P1.5
SCK: P3.5 U1.15 | length 21.7
  Top Layer w0.254: P3.5 -17.297,0.457 -7.674,0.457 -1.75,6.381 U1.15
SWCLK: P1.3 U1.37 | length 8.3
  Top Layer w0.254: U1.37 8.791,16.05 P1.3
SWDIO: P1.4 U1.34 | length 7.1
  Top Layer w0.254: U1.34 6.773,13.75 8.611,11.913 P1.4
TXD: P1.6 U1.30 | length 9.4
  Top Layer w0.254: U1.30 7.198,11.75 9.144,9.804 9.144,8.077 P1.6
VCC: C8.2 C11.2 C12.1 C22.2 C23.2 C24.2 C25.2 L1.2 P1.1 P3.2 R1.2 R2.2 R3.2 R4.2 R9.2 U1.1 U1.9 U1.24 U1.36 U1.48 U3.2 U3.4 U3.13 U4.8 U4.13 | length 176.3
  Top Layer w0.254: v4@-17.526,-5.842 cw(c-17.094,-6.875) -16.942,-5.766 ; v4@-17.501,-5.41 ccw(c-17.107,-4.737) -16.891,-5.486 ; -2.604,-4.521 C12.1 C12.1@-1.92,-4.778 ; P1.1@9.83,19.558 cw(c4.19,21.539) 9.347,18.517 cw(c10.762,16.386) 10.439,18.923 cw(c10.08,16.136) 11.214,18.707 cw(c13.148,19.711) P1.1@10.973,19.583 ; R4.2@13.691,13.437 ccw(c8.136,10.945) 13.208,14.312 ccw(c31.057,44.489) R4.2@14.072,13.818 ; -6.325,10.75 ccw(c-6.792,12.185) -5.893,10.973 ccw(c-5.27,11.724) -5.334,10.75 ccw(c-5.261,9.671) -5.867,10.566 cw(c24.257,86.245) -6.325,10.75
  Top Layer w0.304: 8.935,13.386 11.201,13.386
  Top Layer w0.354: P3.2 -15.723,3.454 -12.243,3.454 -7.279,8.418 -7.279,9.928 -6.458,10.75 U1.9 ; U3.2 -11.528,-4.627 -11.278,-4.877 -11.278,-5.232 ; C8.2 -11.662,-9.598 -13.386,-7.874 -13.386,-5.969 -13.044,-5.627 U3.4 -11.52,-5.627 -11.278,-5.385 -11.278,-5.232 ; v1(-5.885,14.75) U1.1 -3.132,14.75 -2.75,15.132 U1.48 ; v1(-3.734,-6.452) -3.734,-6.985 -2.438,-8.28 4.445,-8.28 5.334,-7.391 5.334,-6.56 C11.2 3.977,-1.829 ; v1(-3.734,-4.521) -2.604,-4.521 ; C12.1 -0.75,-4.035 U4.8 ; C12.1@-1.92,-4.778 R3.2 -9.401,-2.035 -10.02,-2.654 U3.13 -10.02,-3.974 -11.278,-5.232 ; U4.13 3.398,-1.25 3.977,-1.829 ; U1.24 2.75,4.757 5.505,4.757 6.172,4.089 6.172,0.365 3.977,-1.829 ; U1.36 7.571,14.75 8.935,13.386 ; 11.201,13.386 11.684,13.868 11.684,14.91 10.871,15.723 9.957,15.723 9.119,16.561 9.119,18.263 P1.1 12.04,17.882 12.04,16.002 12.649,15.392 12.649,14.871 13.992,13.528 R9.2
  Top Layer w0.554: v4(-17.514,-5.627) -13.044,-5.627
  Bottom Layer w0.254: -5.885,11.176 ccw(c-5.466,11.181) -5.461,10.762 ; -5.885,11.43 ccw(c-5.2,11.448) -5.182,10.762 ; P1.1@10.058,18.974 ccw(c8.768,17.782) 8.915,19.533 ccw(c8.431,22.328) P1.1@10.109,20.041 ; P1.1@10.846,20.117 ccw(c12.046,21.054) 11.985,19.533 ccw(c11.925,18.31) P1.1@10.897,18.974
  Bottom Layer w0.354: P3.2 -16.281,5.944 C25.2 ; v1(-5.885,14.75) v1(-5.885,10.762) -3.538,10.762 5.232,19.533 P1.1 13.581,19.533 C24.2 C22.2 L1.2@15.572,13.448 ; v1(-3.734,-6.452) v1(-3.734,-4.521)
  Bottom Layer w0.554: v4@-17.551,-5.627 -17.551,2.743 P3.2
VCC_3.7VOUT: C4.2 C17.2 C18.2 C19.2 C20.2 C21.1 D4.3 D5.3 D6.3 D7.3 L2.1 M1.1 M2.1 M3.1 M4.1 P5.2 R10.2 | length 304.3
  Top Layer w0.254: v2@11.049,-15.469 ccw(c12.332,-15.634) C21.1@12.167,-16.916 ; v2(11.252,-15.418) ccw(c12.395,-15.519) C21.1@12.294,-16.662
  Top Layer w0.554: 10.595,-16.075 v2(11.252,-15.418) 11.887,-16.053
  Top Layer w1.254: M1.1 -30.349,30.277 D4.3 ; M3.1 -30,-30.072 D6.3 ; P5.2 5.029,-16.117 C4.2@7.645,-16.117 ; C4.2 C21.1@10.595,-16.081 ; D7.3 31.318,31.39 M4.1 ; D5.3 30.069,-29.997 M2.1
  Bottom Layer w0.254: -22,-22 -19.5,-22 22,-22 22,-19.562 22,22 19.943,22 -22,22 -22,19.841 -22,-22
  Bottom Layer w0.554: C19.2 -30.74,-32.5 M3.1 -31.588,-34.088 ; -22,19.841 -21.742,19.583 ; 19.583,21.641 19.943,22
  Bottom Layer w0.654: v2(11.252,-15.418) 16.7,-15.418
  Bottom Layer w1.254: C17.2 -32.436,30.955 M1.1 -22,19.841 ; C19.2 -31.588,-34.088 ; M3.1 -19.5,-22 -19.05,-21.55 ; 16.7,-15.418 L2.1 21.49,-14.81 ; 19.943,22 M4.1 32.251,33.376 C20.2 ; 21.793,-19.355 22,-19.562 M2.1 32.436,-30.905 C18.2
VCC_BAT: P4.2 P5.1 R12.2 | length 14
  Bottom Layer w0.254: P5.1 P5.1@7.569,-18.593
  Bottom Layer w0.354: R12.2 3.508,-16.564 4.064,-17.12 6.096,-17.12 P5.1@7.569,-18.593
  Bottom Layer w1.254: P5.1 12.827,-18.771 P4.2
pads on no net: P2. P2.2 P2.3 P2.4 P2.MH1 P2.MH2 U1.2 U1.3 U1.4 U1.10 U1.13 U1.19 U1.25 U1.26 U1.27 U1.28 U1.29 U1.32 U1.33 U1.38 U1.39 U2.4 U3.3 U3.5 U3.6 U3.7 U3.14 U3.15 U4.2 U4.3 U4.4 U4.5 U4.12 U4.14 U4.15 U4.16 U4.17 U4.19 U4.21 U4.22 U4.25 U5.4

## Keep-outs
Keep-Out Layer:
  lines w0.254: 59.227,152.548 46.527,165.248 47.734,166.455 43.534,170.655 44.931,172.052 49.131,167.852 50.337,169.058 63.037,156.358 100.437,156.358 ; 59.237,152.558 59.237,115.158 46.537,102.458 47.744,101.252 43.544,97.052 44.941,95.655 49.141,99.855 50.347,98.648 63.047,111.348 100.447,111.348 ; 100.427,156.368 113.127,169.068 114.334,167.862 118.534,172.062 119.931,170.665 115.731,166.465 116.937,165.258 104.237,152.558 104.237,115.158 ; 100.437,111.358 113.137,98.658 114.344,99.865 118.544,95.665 119.941,97.062 115.741,101.262 116.947,102.468 104.247,115.168 ; -66.797,100.112 ccw(c-75.848,122.397) -51.797,122.112 -51.797,137.112 ccw(c-75.848,136.827) -66.797,159.112 cw(c-66.797,167.112) -58.797,167.112 ccw(c-36.512,176.163) -36.797,152.112 -21.797,152.112 ccw(c-22.082,176.163) 0.203,167.112 cw(c8.203,167.112) 8.203,159.112 ccw(c17.254,136.827) -6.797,137.112 -6.797,122.112 ccw(c17.254,122.397) 8.203,100.112 cw(c8.203,92.112) 0.203,92.112 ccw(c-22.082,83.06) -21.797,107.112 -36.797,107.112 ccw(c-36.512,83.06) -58.797,92.112 cw(c-66.797,92.112) -66.797,100.112 ; -37.5,-29.5 ccw(c-46.551,-7.215) -22.5,-7.5 -22.5,7.5 ccw(c-46.551,7.215) -37.5,29.5 cw(c-37.5,37.5) -29.5,37.5 ccw(c-7.215,46.551) -7.5,22.5 7.5,22.5 ccw(c7.215,46.551) 29.5,37.5 cw(c37.5,37.5) 37.5,29.5 ccw(c46.551,7.215) 22.5,7.5 22.5,-7.5 ccw(c46.551,-7.215) 37.5,-29.5 cw(c37.5,-37.5) 29.5,-37.5 ccw(c7.215,-46.551) 7.5,-22.5 -7.5,-22.5 ccw(c-7.215,-46.551) -29.5,-37.5 cw(c-37.5,-37.5) -37.5,-29.5

## Other copper
Top Layer:
  rectangle net BGND: -22.123,-20.701 -20.904,17.424
  rectangle net BGND: -17.475,-22.149 20.422,-20.625
  rectangle net BGND: 20.904,-17.755 22.123,19.05
  rectangle net BGND: -20.676,20.904 17.755,22.123
  rectangle net BGND: -21.311,-19.152 -16.485,-15.951
  rectangle net BGND: -17.653,-22.149 -16.002,-15.951
  rectangle net BGND: 16.002,-18.059 22.123,-14.91
  rectangle net BGND: 16.002,-21.514 19.177,-15.011
  rectangle net BGND: 15.418,16.942 17.882,22.098
  rectangle net BGND: 15.418,16.942 22.123,19.355
  rectangle net BGND: -22.123,14.199 -14.834,17.704
  rectangle net BGND: -19.152,15.265 -14.834,22.123
  rectangle net VCC: 13.538,12.192 14.478,13.538
Bottom Layer:
  rectangle net VCC_3.7VOUT: -22,20.904 22,22.2
  region net VCC_3.7VOUT: -20.904,-22 -20.904,22 -22.174,22 -22.174,-22
  region net VCC_3.7VOUT: 22,-20.777 -22,-20.777 -22,-22.2 22,-22.2
  region net VCC_3.7VOUT: 20.904,22 20.904,-22 22.174,-22 22.174,22

## Silkscreen, mask and mechanical layers (free items; w line width, h text height)
Top Overlay:
  lines w0.254: -43.713,-43.967 -43.205,-45.491 ; -43.713,43.967 -43.205,45.491 ; -43.459,-45.491 -42.951,-45.491 ; -43.459,45.491 -42.951,45.491 ; -43.205,-8.024 -43.205,-45.491 ; -43.205,8.024 -43.205,45.491 ; -42.697,-43.967 -43.205,-45.491 ; -42.697,43.967 -43.205,45.491 ; -40.508,-20.976 -40,-22.5 ; -40.508,20.976 -40,22.5 ; -40.254,-22.5 -39.746,-22.5 ; -40.254,22.5 -39.746,22.5 ; -40,-5.104 -40,-22.5 ; -40,5.104 -40,22.5 ; -39.492,-20.976 -40,-22.5 ; -39.492,20.976 -40,22.5 ; -38.008,-35.976 -37.5,-37.5 ; -38.008,35.976 -37.5,37.5 ; -37.754,-37.5 -37.246,-37.5 ; -37.754,37.5 -37.246,37.5 ; -37.5,-5.104 -37.5,-37.5 ; -37.5,5.104 -37.5,37.5 ; -36.992,-35.976 -37.5,-37.5 ; -36.992,35.976 -37.5,37.5 ; -22.5,38.192 -22.5,38.7 ; -20.976,37.938 -22.5,38.446 ; -20.976,38.954 -22.5,38.446 ; -5.104,38.446 -22.5,38.446 ; 5.104,38.446 22.5,38.446 ; 20.976,37.938 22.5,38.446 ; 20.976,38.954 22.5,38.446 ; 22.5,38.192 22.5,38.7
  text "45 (mm)" at -4.85,37.532 h1.52
  text "45 (mm)" at -39.086,-4.85 h1.52 r90
  text "75 (mm)" at -36.586,-4.85 h1.52 r90
  text "90.983 (mm)" at -42.291,-7.77 h1.52 r90